# EAGLE board OttoPi05 (EAGLE 9.6.2)
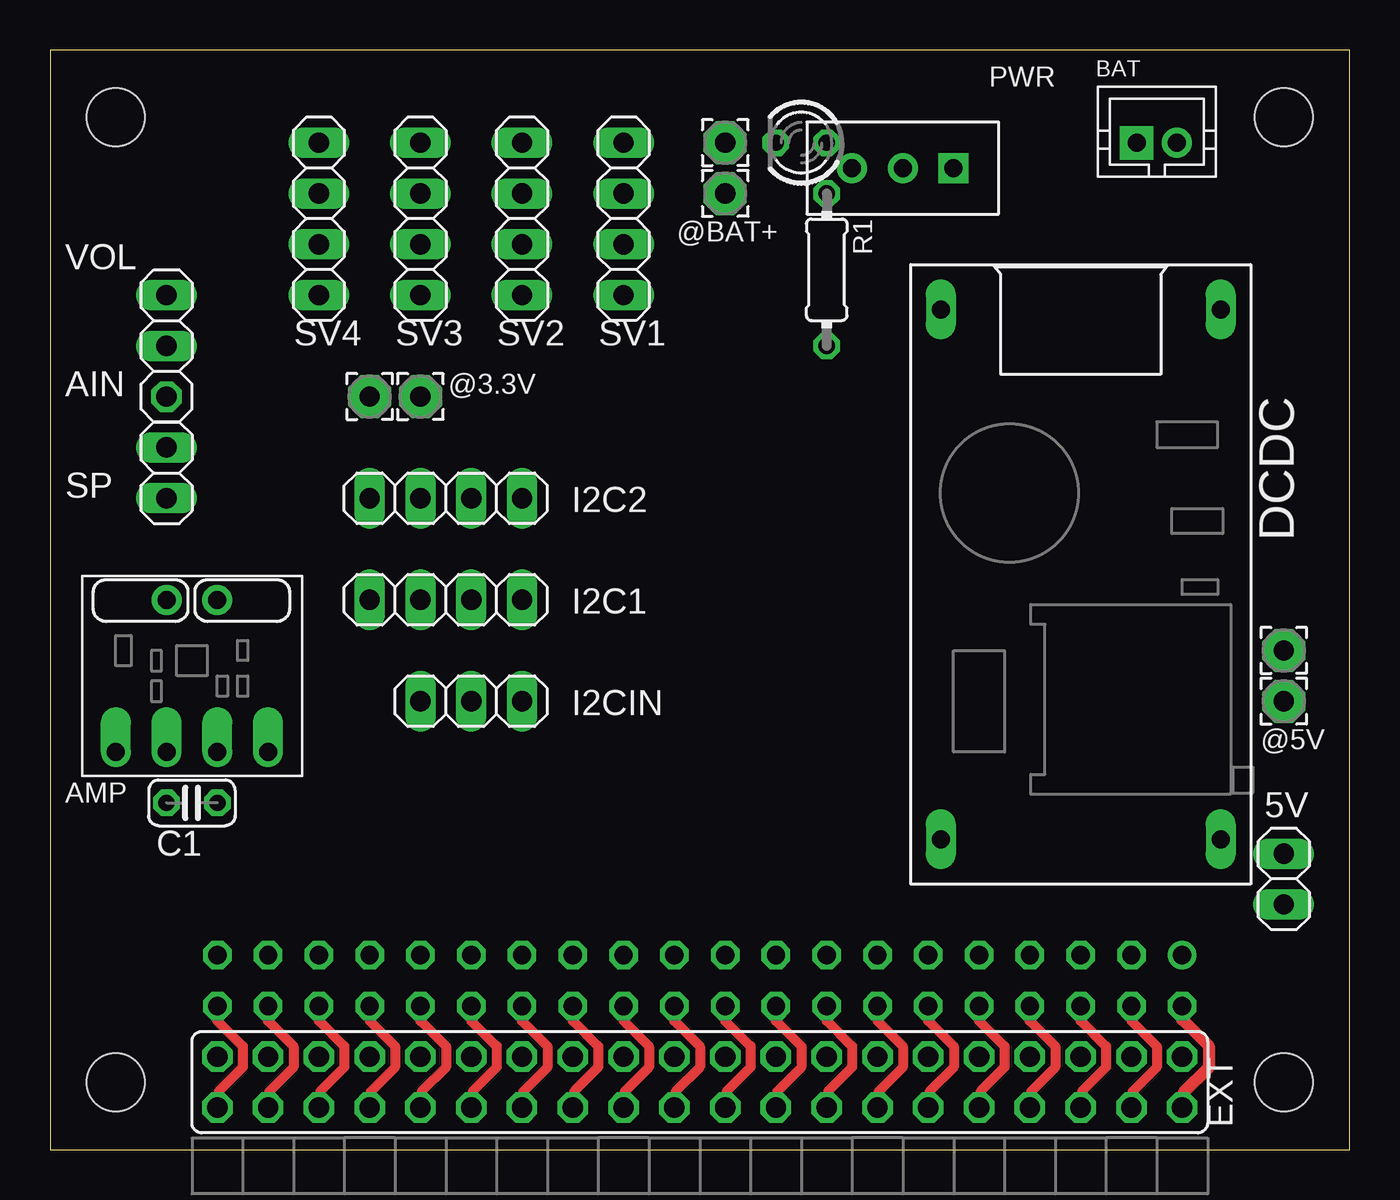
[diagram p0: board, top side]
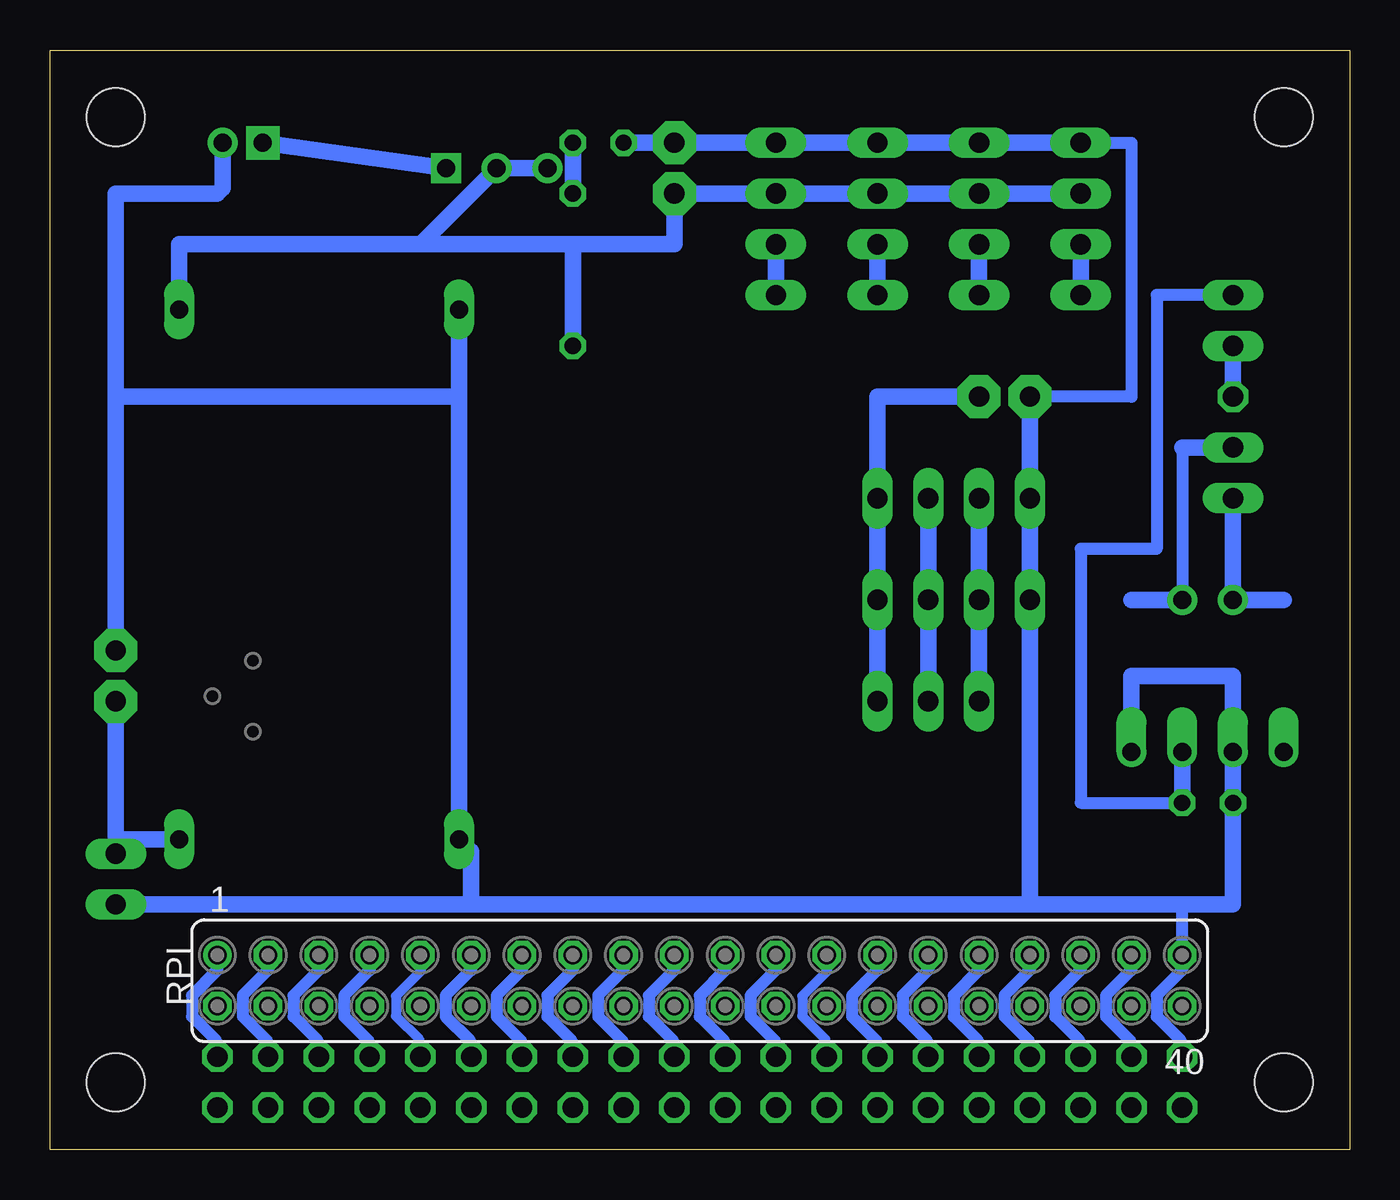
[diagram p1: board, bottom side, seen from below]

Size 65 x 55 mm. Coordinates in mm from the lower left corner, seen from the top.
Outline: 0,55 0,0 65,0 65,55 0,55
Copper layers (1*16): Top 0.035mm / dielectric 1.5mm / Bottom 0.035mm
Design rules "SeeedStudio_2layer_DRU_no_angle_20140221": minimum track width 6mil, minimum drill 12mil, track to track 6mil, track to pad 6mil, pad to pad 6mil, via to via 6mil, smd to smd 0mil, copper to edge 10mil, drill to drill 10mil, minimum pad ring 10mil, minimum via ring 6mil, stop-mask expansion 2mil, vias tented up to drill 100mil, thermal gap 10mil
Net classes: 0 default: clearance 0.254 mm
Holes 2.9 mm at 3.29,3.37 61.71,3.37 61.71,51.63 3.29,51.63

## Footprints (pad centres in the part's own frame; a part is rotated, then mirrored left to right if it is on the bottom)
1X02 = drill 1.016 long: 1 -1.27,0; 2 1.27,0
2,15/1,0 = drill 1.016 pad 2.159 octagon: 1 0,0
1X01 = drill 1.016 octagon: 1 0,0
PAM8012MOD-A = drill 0.9 pad 1.5 offset: GND -3.81,1.27; IN+ -3.81,-1.27; IN- -3.81,-3.81; V+ -3.81,3.81 | drill 0.9 pad 1.5: SP+@1 3.81,1.27; SP-@1 3.81,-1.27
JST-PH2 = drill 0.9 pad 1.676 square: 1 -1,0 | drill 0.9 pad 1.5: 2 1,0
C025-024X044 = drill 0.813 octagon: 1 -1.27,0; 2 1.27,0
DCDC-5V_28V-2A = drill 0.9 pad 1.5 long: VIN+ -13.25,7; VIN- -13.25,-7; VOUT+ 13.25,7; VOUT- 13.25,-7
MA20-2W = drill 1.016 octagon: 1 0,0; 2 0,2.54; 3 2.54,0; 4 2.54,2.54; 5 5.08,0; 6 5.08,2.54; 7 7.62,0; 8 7.62,2.54; 9 10.16,0; 10 10.16,2.54; 11 12.7,0; 12 12.7,2.54; 13 15.24,0; 14 15.24,2.54; 15 17.78,0; 16 17.78,2.54; 17 20.32,0; 18 20.32,2.54; 19 22.86,0; 20 22.86,2.54; 21 25.4,0; 22 25.4,2.54; 23 27.94,0; 24 27.94,2.54; 25 30.48,0; 26 30.48,2.54; 27 33.02,0; 28 33.02,2.54; 29 35.56,0; 30 35.56,2.54; 31 38.1,0; 32 38.1,2.54; 33 40.64,0; 34 40.64,2.54; 35 43.18,0; 36 43.18,2.54; 37 45.72,0; 38 45.72,2.54; 39 48.26,0; 40 48.26,2.54
1X04 = drill 1.016 long: 1 -3.81,0; 2 -1.27,0; 3 1.27,0; 4 3.81,0
1X03 = drill 1.016 long: 1 -2.54,0; 2 0,0; 3 2.54,0
LED3MM = drill 0.813 octagon: A -1.27,0; K 1.27,0
SW3-1 = drill 0.9 pad 1.5 square: 1 1.27,1.27 | drill 0.9 pad 1.5: 2 3.81,1.27; 3 6.35,1.27
0204/7 = drill 0.813 octagon: 1 -3.81,0; 2 3.81,0
FE20-2 = drill 0.914: 1 -24.13,1.27 | drill 0.914 octagon: 2 -24.13,-1.27; 3 -21.59,1.27; 4 -21.59,-1.27; 5 -19.05,1.27; 6 -19.05,-1.27; 7 -16.51,1.27; 8 -16.51,-1.27; 9 -13.97,1.27; 10 -13.97,-1.27; 11 -11.43,1.27; 12 -11.43,-1.27; 13 -8.89,1.27; 14 -8.89,-1.27; 15 -6.35,1.27; 16 -6.35,-1.27; 17 -3.81,1.27; 18 -3.81,-1.27; 19 -1.27,1.27; 20 -1.27,-1.27; 21 1.27,1.27; 22 1.27,-1.27; 23 3.81,1.27; 24 3.81,-1.27; 25 6.35,1.27; 26 6.35,-1.27; 27 8.89,1.27; 28 8.89,-1.27; 29 11.43,1.27; 30 11.43,-1.27; 31 13.97,1.27; 32 13.97,-1.27; 33 16.51,1.27; 34 16.51,-1.27; 35 19.05,1.27; 36 19.05,-1.27; 37 21.59,1.27; 38 21.59,-1.27; 39 24.13,1.27; 40 24.13,-1.27

## Placement (x,y rotation side)
5V  [1X02]  61.71,13.53 270 top
@3.3V  [2,15/1,0]  18.53,37.66 0 top
@5V  [2,15/1,0]  61.71,22.42 0 top
@BAT+  [2,15/1,0]  33.77,47.82 0 top
AIN  [1X01]  5.83,37.66 180 top
AMP  PAM8012MOD  [PAM8012MOD-A]  7.1,23.69 90 top
BAT  [JST-PH2]  55.36,50.36 0 top
C1  [C025-024X044]  7.1,17.34 180 top
DCDC  [DCDC-5V_28V-2A]  51.55,28.77 270 top
EXT  [MA20-2W]  56.63,4.64 180 top
G5V  [2,15/1,0]  61.71,24.96 0 top
I2C1  [1X04]  19.8,27.5 180 top
I2C2  [1X04]  19.8,32.58 180 top
I2CIN  [1X03]  21.07,22.42 180 top
LED1  [LED3MM]  37.58,50.36 180 top
PAD4  [2,15/1,0]  15.99,37.66 0 top
PAD6  [2,15/1,0]  33.77,50.36 0 top
PWR  [SW3-1]  46.47,50.36 180 top
R1  1K  [0204/7]  38.85,44.01 270 top
RPI  [FE20-2]  32.5,8.45 0 bottom
SP  [1X02]  5.83,33.85 90 top
SV1  [1X04]  28.69,46.55 270 top
SV2  [1X04]  23.61,46.55 270 top
SV3  [1X04]  18.53,46.55 270 top
SV4  [1X04]  13.45,46.55 270 top
VOL  [1X02]  5.83,41.47 90 top

## Library data of the parts
5V AIN I2C1 I2C2 I2CIN SP SV1-SV4 VOL = pinhead
@3.3V @5V @BAT+ G5V PAD4 PAD6 = wirepad
AMP = ytani1; CHIP1: PAM8012; OC_AKIZUKI: K-08217; URL_AKIZUKI: https://akizukidenshi.com/catalog/g/gK-08217/
BAT = ytani1
C1 = rcl; SPICEPREFIX: C
DCDC = ytani1; URL_AMAZON: https://www.amazon.co.jp/gp/product/B01D0WSBGY/
EXT = con-lstb; OC_FARNELL: unknown; OC_NEWARK: unknown
LED1 = led
PWR = ytani1; MF: HiLetgo; URL_AMAZON: https://www.amazon.co.jp/gp/product/B01LYVYQNO/
R1 = rcl; SPICEPREFIX: R
RPI = con-lsta; OC_FARNELL: unknown; OC_NEWARK: unknown

## Nets
+3V3: @3.3V.1 I2C1.1 I2C2.1 I2CIN.1
+3V3-S1: EXT.1 RPI.1
+3V3-S2: EXT.17 RPI.17
+5V: 5V.1 @5V.1 DCDC.VOUT+
+5V-S1: EXT.2 RPI.2
+5V-S2: EXT.4 RPI.4
AIN: AMP.IN+ C1.1 VOL.2
AIN1: AIN.1 VOL.1
BAT+: @BAT+.1 DCDC.VIN+ PWR.2 PWR.3 R1.2 SV1.2 SV2.2 SV3.2 SV4.2
BAT+S: BAT.1 PWR.1
GND: 5V.2 AMP.GND AMP.IN- BAT.2 C1.2 DCDC.VIN- DCDC.VOUT- EXT.39 G5V.1 I2C1.4 I2C2.4 LED1.K PAD4.1 PAD6.1 RPI.39 SV1.1 SV2.1 SV3.1 SV4.1
GND6: EXT.6 RPI.6
GND9: EXT.9 RPI.9
GND14: EXT.14 RPI.14
GND20: EXT.20 RPI.20
GND25: EXT.25 RPI.25
GND30: EXT.30 RPI.30
GND34: EXT.34 RPI.34
GPIO0: EXT.27 RPI.27
GPIO1: EXT.28 RPI.28
GPIO4: EXT.7 RPI.7
GPIO5: EXT.29 RPI.29
GPIO6: EXT.31 RPI.31
GPIO7: EXT.26 RPI.26
GPIO8: EXT.24 RPI.24
GPIO9: EXT.21 RPI.21
GPIO10: EXT.19 RPI.19
GPIO11: EXT.23 RPI.23
GPIO12: EXT.32 RPI.32
GPIO13: EXT.33 RPI.33
GPIO14: EXT.8 RPI.8
GPIO15: EXT.10 RPI.10
GPIO16: EXT.36 RPI.36
GPIO17: EXT.11 RPI.11
GPIO18: EXT.12 RPI.12
GPIO19: EXT.35 RPI.35
GPIO20: EXT.38 RPI.38
GPIO21: EXT.40 RPI.40
GPIO22: EXT.15 RPI.15
GPIO23: EXT.16 RPI.16
GPIO24: EXT.18 RPI.18
GPIO25: EXT.22 RPI.22
GPIO26: EXT.37 RPI.37
GPIO27: EXT.13 RPI.13
LED: LED1.A R1.1
SCL: I2C1.3 I2C2.3 I2CIN.3
SCL-S: EXT.5 RPI.5
SDA-S: EXT.3 RPI.3
SDL: I2C1.2 I2C2.2 I2CIN.2
SP+: AMP.SP+@1 SP.1
SP-: AMP.SP-@1 SP.2
SV1: SV1.3 SV1.4
SV2: SV2.3 SV2.4
SV3: SV3.3 SV3.4
SV4: SV4.3 SV4.4
V+: AMP.V+

## Tracks (layer width: path | path; a pad name or v marks a point on that pad's centre or on a via)
+3V3
  Bottom 0.813: I2CIN.1 I2C1.1 I2C2.1 23.61,37.66 @3.3V.1
+3V3-S1
  Bottom 0.61: RPI.1 56.63,8.98 57.9,7.71 57.9,6.65 56.7,5.45 EXT.1
+3V3-S2
  Bottom 0.61: RPI.17 36.31,8.98 37.58,7.71 37.58,6.65 36.38,5.45 EXT.17
+5V
  Bottom 0.813: DCDC.VOUT+ 61.71,15.52 5V.1 @5V.1
+5V-S1
  Top 0.61: RPI.2 56.63,6.51 57.95,5.19 57.95,4.09 56.69,2.83 EXT.2
+5V-S2
  Top 0.508: RPI.4 54.09,6.44 55.36,5.17 55.36,4.11 54.16,2.91 EXT.4
AIN
  Bottom 0.61: VOL.2 9.64,42.74 9.64,30.04 13.45,30.04 13.45,17.34 C1.1
  Bottom 0.813: C1.1 AMP.IN+
AIN1
  Bottom 0.813: VOL.1 AIN.1
BAT+
  Bottom 0.813: SV4.2 SV3.2 SV2.2 SV1.2 @BAT+.1 33.77,45.28 38.85,45.28 | PWR.3 PWR.2 46.47,45.28 | 46.47,45.28 58.55,45.28 DCDC.VIN+ | 46.47,45.28 38.85,45.28 | R1.2 38.85,45.28
BAT+S
  Bottom 0.813: PWR.1 BAT.1
GND
  Bottom 0.61: 8.37,12.26 RPI.39 8.37,8.98 9.64,7.71 9.64,6.65 8.44,5.45 EXT.39 | SV4.1 10.91,50.36 10.91,37.66 PAD4.1
  Bottom 0.813: SV4.1 SV3.1 SV2.1 SV1.1 PAD6.1 LED1.K | AMP.IN- 10.91,23.69 5.83,23.69 AMP.GND C1.2 5.83,12.26 8.37,12.26 15.99,12.26 | 43.93,12.26 43.93,14.9 DCDC.VOUT- DCDC.VIN- 44.55,37.66 61.71,37.66 | 43.93,12.26 15.99,12.26 | 15.99,12.26 I2C1.4 I2C2.4 PAD4.1 | 5V.2 43.93,12.26 | 61.71,37.66 61.71,47.82 56.63,47.82 56.36,48.09 BAT.2 | G5V.1 61.71,37.66
GND6
  Top 0.508: RPI.6 51.55,6.44 52.82,5.17 52.82,4.11 51.62,2.91 EXT.6
GND9
  Bottom 0.508: RPI.9 46.47,8.9 47.69,7.69 47.69,6.68 46.55,5.53 EXT.9
GND14
  Top 0.508: RPI.14 41.39,6.44 42.66,5.17 42.66,4.11 41.46,2.91 EXT.14
GND20
  Top 0.508: RPI.20 33.77,6.44 35.04,5.17 35.04,4.11 33.84,2.91 EXT.20
GND25
  Bottom 0.508: RPI.25 26.15,8.9 27.37,7.69 27.37,6.68 26.23,5.53 EXT.25
GND30
  Top 0.508: RPI.30 21.07,6.44 22.34,5.17 22.34,4.11 21.14,2.91 EXT.30
GND34
  Top 0.508: RPI.34 15.99,6.44 17.26,5.17 17.26,4.11 16.06,2.91 EXT.34
GPIO0
  Bottom 0.61: RPI.27 23.61,8.98 24.88,7.71 24.88,6.65 23.68,5.45 EXT.27
GPIO1
  Top 0.508: RPI.28 23.61,6.44 24.88,5.17 24.88,4.11 23.68,2.91 EXT.28
GPIO4
  Bottom 0.61: RPI.7 49.01,8.98 50.28,7.71 50.28,6.65 49.08,5.45 EXT.7
GPIO5
  Bottom 0.61: RPI.29 21.07,8.98 22.34,7.71 22.34,6.65 21.14,5.45 EXT.29
GPIO6
  Bottom 0.61: RPI.31 18.53,8.98 19.8,7.71 19.8,6.65 18.6,5.45 EXT.31
GPIO7
  Top 0.508: RPI.26 26.15,6.44 27.42,5.17 27.42,4.11 26.22,2.91 EXT.26
GPIO8
  Top 0.508: RPI.24 28.69,6.44 29.96,5.17 29.96,4.11 28.76,2.91 EXT.24
GPIO9
  Bottom 0.61: RPI.21 31.23,8.98 32.5,7.71 32.5,6.65 31.3,5.45 EXT.21
GPIO10
  Bottom 0.61: RPI.19 33.77,8.98 35.04,7.71 35.04,6.65 33.84,5.45 EXT.19
GPIO11
  Bottom 0.61: RPI.23 28.69,8.98 29.96,7.71 29.96,6.65 28.76,5.45 EXT.23
GPIO12
  Top 0.508: RPI.32 18.53,6.44 19.8,5.17 19.8,4.11 18.6,2.91 EXT.32
GPIO13
  Bottom 0.61: RPI.33 15.99,8.98 17.26,7.71 17.26,6.65 16.06,5.45 EXT.33
GPIO14
  Top 0.508: RPI.8 49.01,6.44 50.28,5.17 50.28,4.11 49.08,2.91 EXT.8
GPIO15
  Top 0.508: RPI.10 46.47,6.44 47.74,5.17 47.74,4.11 46.54,2.91 EXT.10
GPIO16
  Top 0.508: RPI.36 13.45,6.44 14.72,5.17 14.72,4.11 13.52,2.91 EXT.36
GPIO17
  Bottom 0.61: RPI.11 43.93,8.98 45.2,7.71 45.2,6.65 44,5.45 EXT.11
GPIO18
  Top 0.508: RPI.12 43.93,6.44 45.2,5.17 45.2,4.11 44,2.91 EXT.12
GPIO19
  Bottom 0.61: RPI.35 13.45,8.98 14.72,7.71 14.72,6.65 13.52,5.45 EXT.35
GPIO20
  Top 0.508: RPI.38 10.91,6.44 12.18,5.17 12.18,4.11 10.98,2.91 EXT.38
GPIO21
  Top 0.508: RPI.40 8.37,6.44 9.64,5.17 9.64,4.11 8.44,2.91 EXT.40
GPIO22
  Bottom 0.61: RPI.15 38.85,8.98 40.12,7.71 40.12,6.65 38.92,5.45 EXT.15
GPIO23
  Top 0.508: RPI.16 38.85,6.44 40.12,5.17 40.12,4.11 38.92,2.91 EXT.16
GPIO24
  Top 0.508: RPI.18 36.31,6.44 37.58,5.17 37.58,4.11 36.38,2.91 EXT.18
GPIO25
  Top 0.508: RPI.22 31.23,6.44 32.5,5.17 32.5,4.11 31.3,2.91 EXT.22
GPIO26
  Bottom 0.61: RPI.37 10.91,8.98 12.18,7.71 12.18,6.65 10.98,5.45 EXT.37
GPIO27
  Bottom 0.61: RPI.13 41.39,8.98 42.66,7.71 42.66,6.65 41.46,5.45 EXT.13
LED
  Bottom 0.813: R1.1 LED1.A
SCL
  Bottom 0.813: I2CIN.3 I2C1.3 I2C2.3
SCL-S
  Bottom 0.61: RPI.5 51.55,8.98 52.82,7.71 52.82,6.65 51.62,5.45 EXT.5
SDA-S
  Bottom 0.61: RPI.3 54.09,8.98 55.36,7.71 55.36,6.65 54.16,5.45 EXT.3
SDL
  Bottom 0.813: I2CIN.2 I2C1.2 I2C2.2
SP+
  Bottom 0.813: 3.29,27.5 AMP.SP+@1 SP.1
SP-
  Bottom 0.61: 8.37,35.12 AMP.SP-@1
  Bottom 0.813: AMP.SP-@1 10.91,27.5 | SP.2 8.37,35.12
SV1
  Bottom 0.813: SV1.4 SV1.3
SV2
  Bottom 0.813: SV2.3 SV2.4
SV3
  Bottom 0.813: SV3.4 SV3.3
SV4
  Bottom 0.813: SV4.3 SV4.4